# Altium PCB 1x9x1.PcbDoc (part 2 of 2)
Units mil, origin at the board's own origin, x right, y up, seen from the top; angles counter-clockwise.
Board outline 2200 x 5400 mil, 4 copper layers (Top Layer, Mid-Layer 1, Mid-Layer 2, Bottom Layer), stack 43.512 mil thick; 41 components, 51 nets, 356 pads, 603 vias.
Unrouted connection lines stored in the file: 1.
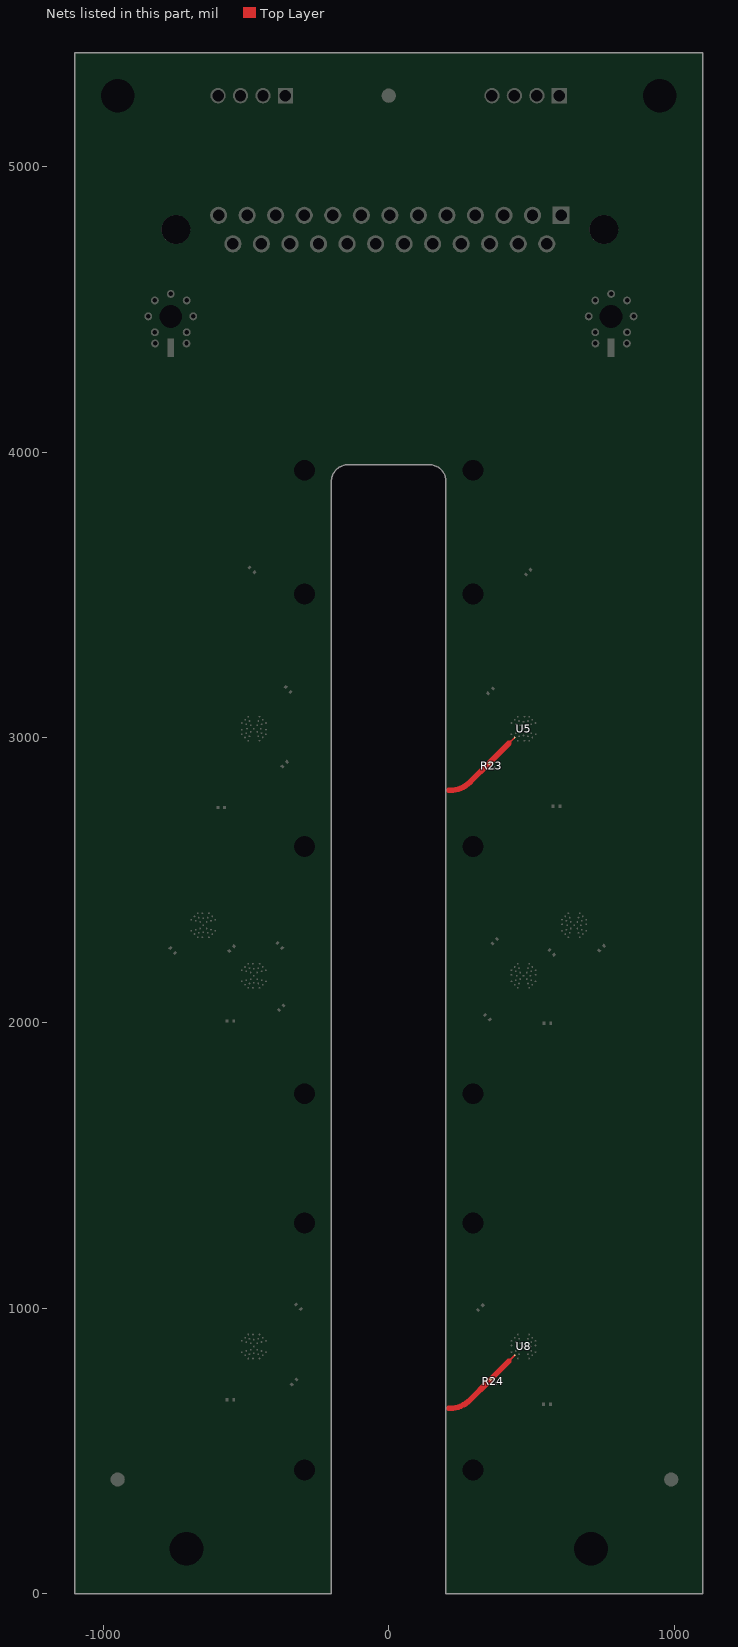
[diagram p4: the nets of this part, all layers, seen from the top]

## Via types
v1: diameter 30, hole 15, Top Layer to Bottom Layer, 563 vias
v2: diameter 25, hole 15, Top Layer to Bottom Layer, 28 vias
v3: diameter 28, hole 28, Top Layer to Bottom Layer, 12 vias

## Nets (pads, with @x,y where several pads share a name; then routed paths per layer and width w, separated by ;. In a path a pad name is that pad's centre, name@x,y a point inside that pad or via, vN(x,y) a via of type N, cw(c..) or ccw(c..) an arc to the next point about the centre after c; other vN are vias at no path point) (continued)
NetR23_2: R23.2 U5.7 | length 303.9
  Top Layer w6: 421.26,2980.32 U5.7@441.5,3000.55
  Top Layer w19.5: 210.89,2814.96 214.48,2814.96 ccw(c214.48,2914.96) 285.19,2844.25 R23.2@352.47,2911.53 ; R23.2@353.65,2910.35 356.38,2913.09 356.38,2915.44 421.26,2980.32
NetR24_2: R24.2 U8.4 | length 303.9
  Top Layer w6: 421.26,814.96 U8.4@441.5,835.2
  Top Layer w19.5: 210.89,649.61 214.48,649.61 ccw(c214.48,749.61) 285.19,678.9 352.47,746.17 ; 353.65,745 356.38,747.73 356.38,750.08 421.26,814.96
pads on no net: f1.1 f2.1 f3.1 J1. J1.13 U1.29 U2.29 U3.29 U4.29 U5.29 U6.29 U7.29 U8.29

## Polygon pours and split planes (outlines as drawn)
GND on Top Layer "NONET_L02_P-001" (solid, pour order 55): -200.79,3900.92 -702.76,3900.92 -702.76,3.6 -419.71,4.92 -200.79,4.92
GND on Top Layer "NONET_L02_P-001" (solid, pour order 40): 201,3897 677,3897 677,-0.22 415,1 201,1
GND on Top Layer "NONET_L02_P-001" (solid, pour order 66): -664.37,3900.59 -664.04,3900.92 -200.79,3900.92 -200.79,3956.69 201,3956.69 201,3897 677.17,3897 677.17,4069.88 -664.37,4069.88 -664.37,3901.57
GND on Top Layer "NONET_L02_P-001" (solid, pour order 56): -681.71,660.92 -865.16,660.92 -865.16,3.92 -681.71,3.92
GND on Top Layer "NONET_L02_P-001" (solid, pour order 54): -662.21,4578.52 -866.21,4578.52 -866.21,656.52 -662.21,656.52
GND on Top Layer "NONET_L02_P-001" (solid, pour order 41): 677,657 881,657 881,0 677,0
GND on Top Layer "NONET_L02_P-001" (solid, pour order 39): 677,4579 881,4579 881,657 677,657
no net on Top Solder "NONET_L-01_P-001" (solid): -200.79,3136 -345,3136 -321,3160 -360,3199 -384,3175 -345,3136 -866.14,3136 -866.14,3532.48 -200.79,3532.48
no net on Top Solder "NONET_L-01_P-001" (solid): 442,698 427,713 360,713 360,675 420,615 466,615 466,673 441,698
no net on Top Solder "NONET_L-01_P-001" (solid): 351.81,846.46 323.83,818.47 318.47,818.47 240.16,740.16 200.79,740.16 200.79,578.74 304.74,578.74 406,680 333,753 332,753 358,779 401,736 375.5,710.5 406,680 406,685.53 439,718.53 439,764 434.27,764
no net on Top Solder "NONET_L-01_P-001" (solid): -205.71,3956.69 200.79,3956.69 200.79,3896.25 676.76,3896.25 677.17,3896.65 677.17,4070.87 -662.4,4070.87 -662.4,3900.59 -205.72,3900.59 -205.63,3900.5
no net on Top Solder "NONET_L02_P-001" (solid): -387.3,2306.59 -338.58,2257.87 -290.35,2306.1 -290.35,2314.96 -335.63,2360.24 -387.3,2308.56
no net on Top Solder "NONET_L02_P-001" (solid): -400.59,2293.31 -374.02,2319.88 -374.02,2371.06 -409.45,2371.06 -411.42,2373.03 -412.4,2372.05 -412.4,2305.12
no net on Top Solder "NONET_L02_P-001" (solid): -416.34,2195.37 -416.34,2221.46 -456.69,2221.46 -456.69,2261.81 -441.93,2276.57 -441.93,2291.34 -439.96,2293.31 -424.21,2293.31 -412.4,2305.12 -400.59,2293.31 -400.59,2292.32 -414.37,2278.54 -374.02,2238.19 -374.02,2237.7
no net on Top Solder "NONET_L02_P-001" (solid): -562.01,2226.38 -518.7,2269.68 -518.7,2269.69 -535.43,2286.42 -498.03,2286.42 -498.03,2285.43 -485.24,2272.64 -485.24,2221.46 -527.56,2221.46 -528.54,2220.47 -534.45,2226.38 -548.23,2226.38
no net on Top Solder "NONET_L02_P-001" (solid): -375.98,2081.69 -370.57,2087.11 -340.55,2057.09 -200.79,2057.09 -200.79,2305.12 -306.59,2305.12 -416.34,2195.37 -416.34,2081.69
no net on Top Solder "NONET_L02_P-001" (solid): -523.15,2024.61 -522.64,2024.09 -522.64,1978.35 -508.86,1978.35 -500,1987.2 -500,1993.11 -508.86,2001.97 -508.86,2019.68 -505.91,2019.68 -497.05,2028.54 -485.24,2028.54 -485.24,2109.25 -528.54,2109.25 -528.54,2220.47 -534.45,2226.38 -562.01,2226.38 -562.01,2024.61
no net on Top Solder "NONET_L02_P-001" (solid): -433.07,1986.22 -418.31,2000.98 -418.31,2025.59 -427.17,2034.45 -451.77,2034.45 -451.77,2109.25 -375.98,2109.25 -375.98,2081.69 -411.42,2046.26 -384.84,2019.68 -336.61,2067.91 -200.79,2067.91 -200.79,1976.38 -430.12,1976.38 -430.12,1983.27
no net on Top Solder "NONET_L02_P-001" (solid): -662.4,2220.47 -680.12,2202.76 -697.83,2202.76 -705.71,2194.88 -705.71,2172.24 -694.88,2161.42 -671.26,2161.42 -637.8,2194.88 -617.13,2194.88 -617.13,2196.85 -605.31,2208.66 -605.31,2226.38 -617.13,2238.19 -631.89,2238.19 -631.89,2286.42 -545.77,2286.42 -580.71,2251.48 -580.71,2250.98 -559.06,2229.33 -562.01,2226.38 -562.01,2024.61 -583.15,2024.61 -582.68,2024.13 -582.68,1970.47 -750,1970.47 -751.97,1972.44 -748.03,1976.38 -748.03,2220.47
no net on Top Solder "NONET_L02_P-001" (solid): -767.41,2282.78 -762.8,2287.4 -762.8,2286.42 -722.44,2246.06 -748.03,2220.47 -662.4,2220.47 -662.4,2286.42 -704.72,2286.42 -705.71,2287.4 -769.33,2287.4 -769.33,2284.7
no net on Top Solder "NONET_L02_P-001" (solid): -866.14,1988.19 -866.14,2287.4 -762.8,2287.4 -788.39,2261.81 -788.39,2260.83 -748.03,2220.47 -748.03,1988.19
no net on Top Solder "NONET_L02_P-001" (solid): -309.06,971.46 -281.5,999.02 -322.83,1040.35 -322.83,1072.83 -200.79,1072.83 -200.79,922.24 -412.15,922.24 -420.28,930.37 -420.28,1074.8 -324.8,1074.8 -322.83,1072.83 -322.83,1038.39 -349.41,1011.81
no net on Top Solder "NONET_L02_P-001" (solid): -485.24,922.24 -485.24,982.28 -500,997.05 -500,1016.73 -505.91,1022.64 -505.91,1046.26 -500.98,1051.18 -473.43,1051.18 -437.01,1014.76 -437.01,1000 -455.71,981.3 -455.71,922.24 -412.15,922.24 -406.5,927.9 -406.5,1072.83 -528.54,1072.83 -528.54,922.24
no net on Top Solder "NONET_L02_P-001" (solid): -528.54,1988.19 -200.79,1988.19 -200.79,1072.83 -528.54,1072.83
no net on Top Solder "NONET_L02_P-001" (solid): -416.34,811.02 -416.34,920.28 -417.32,921.26 -416.34,922.24 -200.79,922.24 -200.79,811.02
no net on Top Solder "NONET_L02_P-001" (solid): -300.28,744.02 -297.24,747.05 -297.24,749.02 -321.85,773.62 -321.85,811.02 -200.79,811.02 -200.79,657.48 -293.31,657.48 -295.28,655.51 -300.28,660.51
no net on Top Solder "NONET_L02_P-001" (solid): -412.4,655.51 -400.59,667.32 -400.59,700.79 -408.46,708.66 -437.01,708.66 -455.71,727.36 -455.71,810.04 -417.32,810.04 -416.34,811.02 -321.85,811.02 -321.85,773.62 -362.2,733.27 -337.6,708.66 -335.63,708.66 -297.24,747.05 -295.28,745.08 -295.28,655.51 -411.42,655.51
no net on Top Solder "NONET_L02_P-001" (solid): -609.25,662.4 -607.28,664.37 -506.89,664.37 -506.89,649.61 -534.45,622.05 -608.27,622.05 -608.27,662.4
no net on Top Solder "NONET_L02_P-001" (solid): -486.22,657.48 -496.06,667.32 -496.06,691.93 -485.24,702.76 -485.24,810.04 -527.56,810.04 -528.54,811.02 -528.54,1988.19 -866.14,1988.19 -866.14,657.48 -582.68,657.48 -582.68,695.87 -527.56,695.87 -524.61,692.91 -524.61,657.48
no net on Top Solder "NONET_L02_P-001" (solid): -867.13,-0.98 -200.79,-0.98 -200.79,657.48 -866.14,657.48 -867.13,656.5 -867.13,0
no net on Top Solder "NONET_L02_P-001" (solid): -612.2,2512.8 -612.2,2480.32 -631.89,2460.63 -631.89,2398.62 -593.5,2398.62 -593.5,2286.42 -498.03,2286.42 -498.03,2301.18 -484.25,2314.96 -461.61,2314.96 -461.61,2320.87 -443.9,2338.58 -421.26,2338.58 -412.4,2329.72 -412.4,2305.12 -200.79,2305.12 -200.79,2512.8
no net on Top Solder "NONET_L02_P-001" (solid): -688.98,2513.78 -697.83,2504.92 -697.83,2476.38 -686.02,2464.57 -662.4,2464.57 -662.4,2399.61 -661.42,2398.62 -705.71,2398.62 -705.71,2287.4 -866.14,2287.4 -866.14,2512.8
no net on Top Solder "NONET_L02_P-001" (solid): -866.14,2846.46 -200.79,2846.46 -200.79,2512.8 -866.14,2512.8 -866.14,2735.24 -556.1,2735.24 -556.1,2773.62 -620.08,2773.62 -620.08,2735.24 -866.14,2735.24
no net on Top Solder "NONET_L02_P-001" (solid): -377.95,2846.46 -377.95,2879.92 -365.16,2879.92 -333.66,2911.42 -333.66,2916.34 -200.79,2916.34 -200.79,2846.46
no net on Top Solder "NONET_L02_P-001" (solid): -200.79,3004.92 -350.39,3004.92 -364.17,3018.7 -416.34,3018.7 -416.34,2975.39 -528.54,2975.39 -528.54,3018.7 -638.78,3018.7 -649.61,3007.87 -670.28,3007.87 -670.28,3010.83 -685.04,3025.59 -866.14,3025.59 -866.14,2846.46 -377.95,2846.46 -377.95,2879.92 -397.64,2899.61 -357.28,2939.96 -333.66,2916.34 -200.79,2916.34
no net on Top Solder "NONET_L02_P-001" (solid): -866.14,3136 -200.79,3136 -200.79,3004.92 -304.13,3004.92 -304.13,3071.85 -324.8,3092.52 -328.74,3092.52 -373.03,3048.23 -416.34,3048.23 -416.34,3087.6 -528.54,3087.6 -528.54,3050.2 -592.52,3050.2 -607.28,3064.96 -607.28,3090.55 -617.13,3100.39 -635.83,3100.39 -650.59,3085.63 -650.59,3059.06 -657.48,3059.06 -685.04,3031.5 -685.04,3025.59 -866.14,3025.59
no net on Top Solder "NONET_L02_P-001" (solid): -865.86,3900.57 -865.84,3900.59 -200.79,3900.59 -200.79,3532.48 -470.47,3532.48 -471.46,3531.5 -471.46,3558.07 -470.47,3558.07 -446.85,3581.69 -486.22,3621.06 -488.19,3621.06 -511.81,3597.44 -471.46,3557.09 -471.46,3532.48 -866.14,3532.48 -866.14,3900.59
no net on Top Solder "NONET_L02_P-001" (solid): -792.32,4325.79 -735.24,4325.79 -735.24,4374.02 -662.4,4374.02 -662.4,3900.59 -866.14,3900.59 -866.14,4374.02 -792.32,4374.02 -866.14,4374.02 -792.32,4374.02
no net on Top Solder "NONET_L02_P-001" (solid): 846.46,2307.09 859.25,2319.88 859.25,2342.52 846.46,2355.32 872.05,2380.91 872.05,2402.56 861.22,2413.39 839.57,2413.39 839.57,2436.02 881.89,2478.35 881.89,2307.09
no net on Top Solder "NONET_L02_P-001" (solid): 610.24,3543.31 401.57,3751.97 200.79,3751.97 200.79,3897.64 201.77,3896.65 677.17,3896.65 677.17,3488.19 610.24,3488.19 677.17,3488.19 610.24,3488.19
no net on Top Solder "NONET_L02_P-001" (solid): 606.3,877.95 881.89,1153.54 881.89,766.73 880.91,765.75 872.05,765.75 868.11,769.68 868.11,792.32 860.24,800.2 838.58,800.2 827.76,789.37 800.2,789.37 711.61,877.95
no net on Top Solder "NONET_L02_P-001" (solid): 423.23,3178.15 423.23,3209.65 430.12,3216.54 507.87,3216.54 500,3224.41 472.44,3224.41 472.44,3488.19 460.63,3488.19 334.65,3614.17 200.79,3614.17 200.79,3310.04 295.28,3310.04 395.67,3209.65 395.67,3178.15
no net on Top Solder "NONET_L02_P-001" (solid): 469.49,2320.87 469.49,2339.57 485.24,2355.32 485.24,2368.11 450.79,2368.11 440.94,2358.27 421.26,2358.27 403.54,2375.98 403.54,2397.64 411.42,2405.51 479.33,2405.51 479.33,2425.2 453.74,2450.79 334.65,2450.79 334.65,2387.8 415.35,2307.09 455.71,2307.09
no net on Top Solder "NONET_L02_P-001" (solid): 200.79,996.06 232.28,996.06 346.46,881.89 293.31,881.89 284.45,890.75 261.81,890.75 250,878.94 250,853.35 259.84,843.5 282.48,843.5 303.15,822.83 316.93,822.83 316.93,823.82 339.57,846.46 346.46,846.46 240.16,740.16 200.79,740.16
no net on Top Solder "NONET_L02_P-001" (solid): 353.04,1985.92 312.99,2025.97 312.99,2026.57 340.55,2054.13 329.23,2065.45 329.23,2120.57 306.59,2120.57 291.34,2135.83 291.34,2151.57 302.17,2162.4 302.17,2199.8 312.01,2199.8 328.74,2216.54 324.8,2220.47 324.8,2238.19 201.77,2238.19 200.79,2237.2 200.79,1981.3 348.43,1981.3
no net on Top Solder "NONET_L02_P-001" (solid): 526.57,2108.27 526.57,1981.3 348.43,1981.3 390.75,2023.62 390.75,2109.25 525.59,2109.25 390.75,2109.25 525.59,2109.25
no net on Top Solder "NONET_L02_P-001" (solid): 200.79,1149.61 291.34,1149.61 472.44,968.5 677.17,1173.23 677.17,1983.27 676.18,1982.28 611.22,1982.28 611.22,1696.85 357.28,1442.91 200.79,1442.91
no net on Top Solder "NONET_L02_P-001" (solid): 200.79,137.8 200.79,0 880.91,0 880.91,724.41 870.08,724.41 858.27,736.22 806.1,736.22 692.91,849.41 646.65,849.41 646.65,363.19 421.26,137.8
no net on Top Solder "NONET_L02_P-001" (solid): 200.79,287.4 354.33,287.4 492.13,425.2 492.13,716.54 437.01,716.54 299.21,578.74 200.79,578.74
no net on Top Solder "NONET_L02_P-001" (solid): 200.79,137.8 421.26,137.8 649.61,366.14
no net on Top Solder "NONET_L02_P-001" (solid): 389.76,3171.26 363.19,3197.83 322.83,3157.48 317.29,3157.48 200.79,3273.98 200.79,3310.04 295.28,3310.04 395.67,3209.65 395.67,3178.15
no net on Top Solder "NONET_L02_P-001" (solid): 349.41,3131.89 395.67,3178.15 423.23,3178.15 435.04,3166.34 450.79,3166.34 456.69,3160.43 456.69,3087.6 419.29,3087.6 418.31,3086.61 373.03,3131.89
no net on Top Solder "NONET_L02_P-001" (solid): 200.79,2968.5 409.45,2968.5 418.31,2977.36 418.31,3086.61 373.03,3131.89 349.41,3131.89 200.79,3280.51 200.79,2977.36
no net on Top Solder "NONET_L02_P-001" (solid): 341.54,2841.54 291.34,2791.34 200.79,2791.34 200.79,2977.36 250.98,2977.36 341.54,2886.81
no net on Top Solder "NONET_L02_P-001" (solid): 356.3,2934.06 331.69,2909.45 331.69,2907.48 370.08,2869.09 342.52,2841.54 341.54,2841.54 341.54,2842.52 245.08,2938.98 351.38,2938.98
no net on Top Solder "NONET_L02_P-001" (solid): 284.45,2464.57 343.5,2405.51 479.33,2405.51 456.69,2428.15 456.69,2677.17 523.62,2744.09 523.62,2832.68 438.98,2832.68 412.4,2859.25 412.4,2874.02 444.88,2906.5 444.88,2976.38 251.97,2976.38 251.97,2938.98 347.44,2938.98 391.73,2894.68 391.73,2891.73 291.34,2791.34 200.79,2791.34 200.79,2464.57
no net on Top Solder "NONET_L02_P-001" (solid): 470.47,1982.28 469.49,1981.3 200.79,1981.3 200.79,1582.68 292.32,1582.68 470.47,1760.83
no net on Top Solder "NONET_L02_P-001" (solid): 525.59,2109.25 416.34,2109.25 416.34,2147.64 356.3,2147.64 302.17,2093.5 302.17,2089.57 392.72,1999.02 415.35,1999.02
no net on Top Solder "NONET_L02_P-001" (solid): 611.22,1982.28 611.22,1696.85 357.28,1442.91 200.79,1442.91 200.79,1582.68 292.32,1582.68 470.47,1760.83 470.47,1982.28
no net on Top Solder "NONET_L02_P-001" (solid): 336.61,2276.57 360.24,2252.95 344.49,2237.2 200.79,2237.2 200.79,2252.95 312.99,2252.95
no net on Top Solder "NONET_L02_P-001" (solid): 360.24,2252.95 336.61,2276.57 377.95,2317.91 401.57,2294.29 428.15,2320.87 284.45,2464.57 200.79,2464.57 200.79,2294.29 200.79,2252.95
no net on Top Solder "NONET_L02_P-001" (solid): 629.92,2216.54 629.92,2193.9 641.73,2182.09 641.73,2124.02 629.92,2112.2 628.94,2113.19 602.36,2113.19 568.9,2146.65 528.54,2146.65 528.54,2130.91 525.59,2127.95 525.59,2017.72 583.66,2017.72 583.66,1979.33 677.17,1979.33 677.17,2216.54
no net on Top Solder "NONET_L02_P-001" (solid): 418.31,2221.46 418.31,2178.15 352.36,2178.15 347.44,2183.07 347.44,2193.9 328.74,2212.6 328.74,2220.47 415.35,2220.47 416.34,2221.46
no net on Top Solder "NONET_L02_P-001" (solid): 525.59,2178.15 590.55,2178.15 590.55,2183.07 601.38,2193.9 629.92,2193.9 629.92,2239.17 603.35,2239.17 580.71,2216.54 576.77,2220.47 525.59,2220.47
no net on Top Solder "NONET_L02_P-001" (solid): 603.35,2239.17 580.71,2216.54 579.72,2216.54 540.35,2255.91 561.02,2276.57 561.02,2281.5 523.32,2319.2 508.25,2304.13 486.22,2304.13 469.49,2320.87 428.15,2320.87 328.74,2221.46 328.74,2220.47 559.06,2220.47 574.8,2204.72 603.35,2204.72
no net on Top Solder "NONET_L02_P-001" (solid): 703.74,2354.33 703.74,2395.67 595.47,2395.67 595.47,2354.33 530.51,2354.33 456.69,2428.15 456.69,2610.24 610.24,2610.24 610.24,2476.38 625.98,2460.63 657.48,2460.63 677.17,2480.32 677.17,2503.94 881.89,2503.94 881.89,2452.76 783.46,2354.33
no net on Top Solder "NONET_L02_P-001" (solid): 677.17,2288.39 594.49,2288.39 594.49,2323.82 518.7,2323.82 627.95,2214.57 677.17,2214.57
no net on Top Solder "NONET_L02_P-001" (solid): 585.63,679.13 586.61,678.15 586.61,649.61 649.61,649.61 646.65,652.56 646.65,849.41 523.62,849.41 523.62,811.02 522.64,810.04 522.64,679.13
no net on Top Solder "NONET_L02_P-001" (solid): 314.96,968.5 287.4,996.06 330.71,1039.37 358.27,1011.81 393.7,1047.24 291.34,1149.61 200.79,1149.61 200.79,996.06 232.28,996.06 287.4,940.94
no net on Top Solder "NONET_L02_P-001" (solid): 417.32,846.46 346.46,846.46 382.59,793.59 437.01,716.54 492.13,716.54 492.13,425.2 354.33,287.4 200.79,287.4 200.79,137.8 421.26,137.8 649.61,366.14 649.61,649.61 526.57,649.61 526.57,811.02 417.32,811.02
no net on Top Solder "NONET_L02_P-001" (solid): 480.32,3547.24 523.62,3590.55 500,3614.17 519.69,3633.86 610.24,3543.31 610.24,3488.19 539.37,3488.19
no net on Top Solder "NONET_L02_P-001" (solid): 460.63,3488.19 334.65,3614.17 200.79,3614.17 200.79,3751.97 401.57,3751.97 519.69,3633.86 456.69,3570.87 539.37,3488.19
no net on Top Solder "NONET_L02_P-001" (solid): 677.17,3086.61 488.19,3086.61 488.19,3165.35 507.87,3185.04 507.87,3216.54 500,3224.41 472.44,3224.41 472.44,3488.19 677.17,3488.19
no net on Top Solder "NONET_L02_P-001" (solid): 523.62,2858.27 523.62,2870.08 488.19,2905.51 488.19,2976.38 527.56,2976.38 527.56,3086.61 677.17,3086.61 677.17,2858.27
no net on Top Solder "NONET_L02_P-001" (solid): 559.06,2858.27 618.11,2858.27 618.11,2779.53 559.06,2779.53
no net on Top Solder "NONET_L02_P-001" (solid): 559.06,2744.09 559.06,2858.27 523.62,2858.27 523.62,2744.09
no net on Top Solder "NONET_L02_P-001" (solid): 618.11,2744.09 618.11,2858.27 677.17,2858.27 677.17,2744.09
no net on Top Solder "NONET_L02_P-001" (solid): 456.69,2610.24 456.69,2677.17 523.62,2744.09 677.17,2744.09 677.17,2610.24
no net on Top Solder "NONET_L02_P-001" (solid): 610.24,2610.24 677.17,2610.24 677.17,2480.32 657.48,2460.63 625.98,2460.63 610.24,2476.38
no net on Top Solder "NONET_L02_P-001" (solid): 629.92,901.57 606.3,877.95 531.5,877.95 531.5,925.2 413.39,925.2 413.39,881.89 346.46,881.89 287.4,940.94 393.7,1047.24 472.44,968.5 511.81,1007.87
no net on Top Solder "NONET_L02_P-001" (solid): 712.6,2255.91 748.03,2291.34 759.84,2291.34 779.53,2271.65 740.16,2232.28 736.22,2232.28 751.97,2216.54 881.89,2216.54 881.89,2307.09 811.02,2307.09 795.28,2322.83 703.74,2322.83 703.74,2288.39 680.12,2288.39
no net on Top Solder "NONET_L02_P-001" (solid): 677.17,2216.54 677.17,2288.39 680.12,2288.39 751.97,2216.54
no net on Top Solder "NONET_L02_P-001" (solid): 881.89,1188.98 881.89,1153.54 622.05,893.7 606.3,909.45 606.3,913.39
no net on Top Solder "NONET_L02_P-001" (solid): 881.89,1188.98 606.3,913.39 511.81,1007.87 677.17,1173.23 677.17,1188.98
no net on Top Solder "NONET_L02_P-001" (solid): 677.17,2216.54 881.89,2216.54 881.89,1188.98 677.17,1188.98
no net on Top Solder "NONET_L02_P-001" (solid): 677.17,4374.02 750.98,4374.02 750.98,4323.82 751.97,4322.83 807.09,4322.83 807.09,4373.03 808.07,4374.02 881.89,4374.02 881.89,4307.09 677.17,4307.09
no net on Top Solder "NONET_L02_P-001" (solid): 677.17,4307.09 881.89,4307.09 881.89,2503.94 677.17,2503.94
GND on Bottom Layer "NONET_L-01_P-001" (solid, pour order 67): -200.79,3897.64 -201,3897.85 -201,3957 201,3957 200.79,3956.79 200.79,3892.06 676.94,3892.06 676.98,3892.02 676.98,4069.95 -660.95,4069.95 -661,4070 -661.08,4069.92 -661.08,3897.54 -200.88,3897.54
GND on Bottom Layer "NONET_L02_P-001" (solid, pour order 46): 676.8,4578.61 880.8,4578.61 880.8,656.61 676.8,656.61
GND on Bottom Layer "NONET_L02_P-001" (solid, pour order 60): -200.79,3897.64 -681.1,3897.64 -681.1,-5.28 -394.4,-3.94 -200.79,-3.94
GND on Bottom Layer "NONET_L02_P-001" (solid, pour order 62): -661.05,656.61 -865.05,656.61 -865.05,-0.39 -661.05,-0.39
GND on Bottom Layer "NONET_L02_P-001" (solid, pour order 61): -661.05,4578.61 -865.05,4578.61 -865.05,656.61 -661.05,656.61
GND on Bottom Layer "NONET_L02_P-001" (solid, pour order 47): 676.8,656.61 880.8,656.61 880.8,-0.39 676.8,-0.39
GND on Bottom Layer "NONET_L02_P-001" (solid, pour order 42): 200.79,3892.06 696.85,3892.06 696.85,-5.28 410.15,-3.94 200.79,-3.94
GND on Mid-Layer 1 "NONET_L-01_P-001" (solid, pour order 69): -201.89,3897.76 -202.11,3897.98 -202.11,3957.13 199.89,3957.13 199.68,3956.91 199.68,3892.19 675.83,3892.19 683,3885.02 683,4070.07 -662.05,4070.07 -662.11,4070.13 -662.18,4070.05 -662.18,3897.67 -201.99,3897.67
GND on Mid-Layer 1 "NONET_L02_P-001" (solid, pour order 63): -200.79,3897.64 -698.82,3897.64 -698.82,-5.36 -394.4,-3.94 -200.79,-3.94
GND on Mid-Layer 1 "NONET_L02_P-001" (solid, pour order 65): -622.05,656.74 -866.14,656.74 -866.14,-0.26 -622.05,-0.26
GND on Mid-Layer 1 "NONET_L02_P-001" (solid, pour order 64): -662.14,4578.74 -866.14,4578.74 -866.14,656.74 -662.14,656.74
GND on Mid-Layer 1 "NONET_L02_P-001" (solid, pour order 49): 637.8,656.74 881.89,656.74 881.89,-0.26 637.8,-0.26
GND on Mid-Layer 1 "NONET_L02_P-001" (solid, pour order 48): 677.89,4578.74 881.89,4578.74 881.89,656.74 677.89,656.74
GND on Mid-Layer 1 "NONET_L02_P-001" (solid, pour order 44): 200.79,3892.06 714.57,3892.06 714.57,-5.36 410.15,-3.94 200.79,-3.94
GND on Mid-Layer 2 "NONET_L-01_P-001" (solid, pour order 70): 200.79,4070 -206,4070 -206,3957 201,3957
GND on Mid-Layer 2 "NONET_L02_P-001" (solid, pour order 57): -205.71,4070 -706.41,4070 -706.41,3.58 -419.71,4.92 -205.71,4.92
GND on Mid-Layer 2 "NONET_L02_P-001" (solid, pour order 59): -687.45,665.6 -865.16,665.6 -865.16,5.91 -687.45,5.91
GND on Mid-Layer 2 "NONET_L02_P-001" (solid, pour order 58): -661.28,4578.79 -865.28,4578.79 -865.28,656.79 -661.28,656.79
GND on Mid-Layer 2 "NONET_L02_P-001" (solid, pour order 53): 677.89,656.74 881.89,656.74 881.89,-0.26 677.89,-0.26
GND on Mid-Layer 2 "NONET_L02_P-001" (solid, pour order 52): 677.89,4578.74 881.89,4578.74 881.89,656.74 677.89,656.74
GND on Mid-Layer 2 "NONET_L02_P-001" (solid, pour order 45): 200.79,4070 696.85,4070 696.85,-5.28 410.15,-3.94 200.79,-3.94
no net on Top Courtyard "NONET_L02_P-001" (solid): -508.86,3596.46 -486.22,3619.09 -485.24,3619.09 -445.87,3579.72 -468.5,3557.09 -469.49,3557.09
no net on Bottom Solder "NONET_L-01_P-001" (solid): -662.4,4070.87 -662.4,3956.69 677.17,3956.69 677.17,4070.87
no net on Bottom Solder "NONET_L-01_P-001" (solid): -866.14,2148.62 -690.94,2148.62 -690.94,2163.39 -697.83,2163.39 -704.72,2170.28 -704.72,2201.77 -700.79,2205.71 -669.29,2205.71 -639.76,2235.24 -616.14,2235.24 -602.36,2221.46 -602.36,2200.79 -598.43,2200.79 -591.54,2207.68 -591.54,2357.28 -866.14,2357.28
no net on Bottom Solder "NONET_L-01_P-001" (solid): -866.14,2148.62 -203.74,2148.62 -200.79,2145.67 -200.79,2357.28 -430.12,2357.28 -430.12,2335.63 -428.15,2335.63 -414.37,2321.85 -414.37,2303.15 -424.21,2293.31 -451.77,2293.31 -458.66,2286.42 -458.66,2279.53 -459.65,2279.53 -466.54,2272.64 -488.19,2272.64 -499.02,2283.46 -499.02,2304.13 -489.17,2313.98 -459.65,2313.98 -455.71,2317.91 -455.71,2328.74 -448.82,2335.63 -430.12,2335.63 -430.12,2357.28 -591.54,2357.28 -591.54,2224.41 -619.09,2196.85 -652.56,2196.85 -665.35,2184.06 -665.35,2170.28 -671.26,2164.37
no net on Bottom Solder "NONET_L-01_P-001" (solid): -866.14,2148.62 -866.14,1958.66 -412.4,1958.66 -412.4,1987.2 -495.08,1987.2 -509.84,2001.97 -509.84,2016.73 -498.03,2028.54 -477.36,2028.54 -477.36,2027.56 -467.52,2017.72 -457.68,2017.72 -445.87,2029.53 -432.09,2029.53 -415.35,2012.8 -415.35,2001.97 -430.12,1987.2 -412.4,1987.2 -412.4,1958.66 -412.2,1958.46 -200.59,1958.46 -200.59,2145.47 -203.74,2148.62
no net on Bottom Solder "NONET_L-01_P-001" (solid): -866.14,966.54 -864.17,964.57 -455.71,964.57 -455.71,986.22 -468.5,986.22 -479.33,997.05 -479.33,1008.86 -493.11,1008.86 -504.92,1020.67 -504.92,1040.35 -493.11,1052.17 -476.38,1052.17 -461.61,1037.4 -461.61,1029.53 -451.77,1029.53 -439.96,1017.72 -439.96,995.08 -448.82,986.22 -455.71,986.22 -455.71,964.57 -454.25,963.11 -200.59,963.11 -200.59,1958.46 -200.79,1958.66 -866.14,1958.66
no net on Bottom Solder "NONET_L-01_P-001" (solid): -866.14,966.54 -866.14,655.51 -486.22,655.51 -487.2,656.5 -487.2,662.4 -494.09,669.29 -494.09,689.96 -482.28,701.77 -465.55,701.77 -455.71,691.93 -443.9,691.93 -432.09,703.74 -413.39,703.74 -402.56,692.91 -402.56,671.26 -411.42,662.4 -459.65,662.4 -463.58,658.46 -486.22,658.46 -487.2,659.45 -487.2,655.51 -200.79,655.51 -200.59,655.71 -200.59,963.11
no net on Bottom Solder "NONET_L-01_P-001" (solid): -866.14,0 -200.79,0 -200.79,655.51 -866.14,655.51
no net on Bottom Solder "NONET_L-01_P-001" (solid): -866.14,2560.04 -654.53,2560.04 -654.53,2512.8 -688.98,2512.8 -697.83,2503.94 -696.85,2502.95 -696.85,2482.28 -687.01,2472.44 -623.03,2472.44 -623.03,2474.41 -612.2,2485.24 -612.2,2502.95 -622.05,2512.8 -654.53,2512.8 -654.53,2560.04 -200.79,2560.04 -200.79,2357.28 -866.14,2357.28
no net on Bottom Solder "NONET_L-01_P-001" (solid): -866.14,2944.88 -507.87,2944.88 -425.2,3027.56 -425.2,3102.36 -625,3102.36 -625,3094.49 -619.09,3094.49 -607.28,3082.68 -607.28,3064.96 -634.84,3037.4 -634.84,3022.64 -650.59,3006.89 -666.34,3006.89 -682.09,3022.64 -682.09,3046.26 -674.21,3054.13 -650.59,3054.13 -645.67,3059.06 -649.61,3062.99 -649.61,3087.6 -641.73,3095.47 -625,3095.47 -625,3102.36 -625.98,3101.38 -866.14,3101.38
no net on Bottom Solder "NONET_L-01_P-001" (solid): -200.79,3101.38 -200.79,2560.04 -312.01,2560.04 -312.01,3049.21 -309.06,3052.17 -309.06,3071.85 -311.02,3071.85 -321.85,3082.68 -324.8,3079.72 -347.44,3079.72 -352.36,3074.8 -352.36,3052.17 -346.46,3046.26 -346.46,3041.34 -355.31,3032.48 -355.31,3012.8 -342.52,3000 -312.01,3000 -312.01,2560.04 -866.14,2560.04 -866.14,2944.88 -507.87,2944.88 -425.2,3027.56 -425.2,3102.36 -201.77,3102.36
no net on Bottom Solder "NONET_L-01_P-001" (solid): -200.79,3956.69 -662.4,3956.69 -662.4,4070.87 -662.4,4578.74 -866.14,4578.74 -865.16,4577.76 -866.14,3101.38 -200.79,3101.38
no net on Bottom Solder "NONET_L-01_P-001" (solid): 677.17,3956.69 677.17,4070.87 677.17,4578.74 881.89,4578.74 881.89,3956.69
no net on Bottom Solder "NONET_L-01_P-001" (solid): 200.79,3074.8 200.79,3956.69 881.89,3956.69 881.89,3074.8 507.87,3074.8 507.87,3204.72 496.06,3216.54 472.44,3216.54 464.57,3208.66 433.07,3208.66 421.26,3196.85 421.26,3177.17 433.07,3165.35 507.87,3165.35 507.87,3074.8
no net on Bottom Solder "NONET_L-01_P-001" (solid): 200.79,2818.9 200.79,3074.8 881.89,3074.8 881.89,2818.9 511.81,2818.9 511.81,2874.02 500,2885.83 433.07,2885.83 417.32,2870.08 417.32,2850.39 429.13,2838.58 511.81,2838.58 511.81,2818.9
no net on Bottom Solder "NONET_L-01_P-001" (solid): 200.79,2405.51 200.79,2818.9 881.89,2818.9 881.89,2409.45 866.14,2409.45 858.27,2417.32 838.58,2417.32 826.77,2405.51 826.77,2366.14 807.09,2346.46 523.62,2346.46 515.75,2354.33 476.38,2354.33 476.38,2350.39 472.44,2346.46 460.63,2358.27 460.63,2389.76 444.88,2405.51 409.45,2405.51 393.7,2389.76 393.7,2405.51
no net on Bottom Solder "NONET_L-01_P-001" (solid): 200.79,2283.46 881.89,2283.46 881.89,2409.45 870.08,2409.45 870.08,2377.95 854.33,2362.2 854.33,2307.09 807.09,2307.09 807.09,2346.46 523.62,2346.46 523.62,2318.9 511.81,2307.09 488.19,2307.09 472.44,2322.83 472.44,2346.46 460.63,2358.27 409.45,2358.27 393.7,2374.02 393.7,2405.51 200.79,2405.51
no net on Bottom Solder "NONET_L-01_P-001" (solid): 200.79,2165.35 200.79,2283.46 881.89,2283.46 881.89,2161.42 645.67,2161.42 645.67,2185.04 629.92,2200.79 598.43,2200.79 578.74,2181.1 578.74,2161.42 350.39,2161.42 350.39,2196.85 338.58,2208.66 307.09,2208.66 299.21,2200.79 299.21,2165.35
no net on Bottom Solder "NONET_L-01_P-001" (solid): 200.79,2165.35 299.21,2165.35 299.21,2125.98 311.02,2114.17 338.58,2114.17 350.39,2125.98 350.39,2161.42 586.61,2161.42 590.55,2157.48 590.55,2122.05 606.3,2106.3 633.86,2106.3 645.67,2118.11 645.67,2161.42 881.89,2161.42 881.89,2043.31 200.79,2043.31
no net on Bottom Solder "NONET_L-01_P-001" (solid): 881.89,716.54 881.89,724.41 866.14,724.41 854.33,736.22 854.33,751.97 846.46,751.97 826.77,771.65 826.77,795.28 838.58,807.09 881.89,807.09 881.89,2043.31 200.79,2043.31 200.79,893.7 299.21,893.7 338.58,854.33 338.58,838.58 318.9,818.9 314.96,822.83 283.46,822.83 248.03,858.27 248.03,893.7 200.79,893.7 200.79,716.54
no net on Bottom Solder "NONET_L-01_P-001" (solid): 881.89,0 881.89,716.54 200.79,716.54 200.79,0

## Other copper
Top Layer:
  region net NetR22_2: 218.63,1092.36 200.81,1092.36 200.81,1072.77 218.63,1072.77
  region net NetR24_2: 218.63,659.51 200.81,659.51 200.81,639.92 218.63,639.92
  region net NetR19_2: 218.02,226.3 200.79,226.3 200.79,206.77 218.02,206.77
  region net NetR18_2: 218.5,1525.59 200.68,1525.59 200.68,1505.88 218.5,1505.88
  region net NetR15_1: 218.63,1958.73 200.81,1958.73 200.81,1939.13 218.63,1939.13
  region net NetR17_2: 218.63,2391.58 200.81,2391.58 200.81,2371.98 218.63,2371.98
  region net NetR23_2: 218.63,2824.87 200.81,2824.87 200.81,2805.27 218.63,2805.27
  region net NetR14_1: 218.63,3257.72 200.81,3257.72 200.81,3238.12 218.63,3238.12
  region net NetR13_2: 218.5,3690.94 200.68,3690.94 200.68,3671.23 218.5,3671.23
  rectangle net NetR1_2: -218.02,206.77 -200.79,226.3
  rectangle net NetR5_2: -218.5,1505.88 -200.68,1525.59
  rectangle net NetR3_2: -218.63,1072.77 -200.81,1092.36
  rectangle net NetR2_1: -218.63,639.92 -200.81,659.51
  rectangle net NetR7_1: -218.63,2371.98 -200.81,2391.58
  rectangle net NetR6_2: -218.63,1939.13 -200.81,1958.73
  rectangle net NetR10_2: -218.63,2805.27 -200.81,2824.87
  rectangle net NetR12_1: -218.63,3238.12 -200.81,3257.72
  rectangle net NetR11_2: -218.5,3671.23 -200.68,3690.94
  pour cut-out: -829.28,4476.38 ccw(c-763.78,4476.38) -763.78,4410.88 ccw(c-763.78,4476.38) -698.28,4476.38 ccw(c-763.78,4476.38) -763.78,4541.88 ccw(c-763.78,4476.38)
  pour cut-out: 714.03,4476.38 ccw(c779.53,4476.38) 779.53,4410.88 ccw(c779.53,4476.38) 845.03,4476.38 ccw(c779.53,4476.38) 779.53,4541.88 ccw(c779.53,4476.38)
  pour cut-out: -791.78,4326.38 -771.78,4306.38 -755.78,4306.38 -735.78,4326.38
  pour cut-out: -791.78,4326.38 -791.78,4476.38 -735.78,4476.38 -735.78,4326.38
  pour cut-out: 751.53,4326.38 771.53,4306.38 787.53,4306.38 807.53,4326.38
  pour cut-out: 751.53,4326.38 751.53,4476.38 807.53,4476.38 807.53,4326.38
Mid-Layer 1:
  pour cut-out: -764.28,4541.88 ccw(c-764.28,4476.38) -829.78,4476.38 ccw(c-764.28,4476.38) -764.28,4410.88 ccw(c-764.28,4476.38) -698.78,4476.38 ccw(c-764.28,4476.38)
  pour cut-out: 779.03,4541.88 ccw(c779.03,4476.38) 713.53,4476.38 ccw(c779.03,4476.38) 779.03,4410.88 ccw(c779.03,4476.38) 844.53,4476.38 ccw(c779.03,4476.38)
  pour cut-out: -785.78,4330.38 -741.78,4330.38 -763.78,4308.38
  pour cut-out: -785.78,4330.38 -785.78,4476.38 -741.78,4476.38 -741.78,4330.38
  pour cut-out: 757.53,4330.38 801.53,4330.38 779.53,4308.38
  pour cut-out: 757.53,4330.38 757.53,4476.38 801.53,4476.38 801.53,4330.38
Mid-Layer 2:
  pour cut-out: -764.28,4541.88 ccw(c-764.28,4476.38) -829.78,4476.38 ccw(c-764.28,4476.38) -764.28,4410.88 ccw(c-764.28,4476.38) -698.78,4476.38 ccw(c-764.28,4476.38)
  pour cut-out: 779.03,4541.88 ccw(c779.03,4476.38) 713.53,4476.38 ccw(c779.03,4476.38) 779.03,4410.88 ccw(c779.03,4476.38) 844.53,4476.38 ccw(c779.03,4476.38)
  pour cut-out: 779.03,4541.88 ccw(c779.03,4476.38) 713.53,4476.38 ccw(c779.03,4476.38) 779.03,4410.88 ccw(c779.03,4476.38) 844.53,4476.38 ccw(c779.03,4476.38)
  pour cut-out: -785.78,4330.38 -741.78,4330.38 -763.78,4308.38
  pour cut-out: -785.78,4330.38 -785.78,4476.38 -741.78,4476.38 -741.78,4330.38
  pour cut-out: 757.53,4330.38 801.53,4330.38 779.53,4308.38
  pour cut-out: 757.53,4330.38 757.53,4476.38 801.53,4476.38 801.53,4330.38
Bottom Layer:
  pour cut-out: -764.28,4541.88 ccw(c-764.28,4476.38) -829.78,4476.38 ccw(c-764.28,4476.38) -764.28,4410.88 ccw(c-764.28,4476.38) -698.78,4476.38 ccw(c-764.28,4476.38)
  pour cut-out: 779.03,4541.88 ccw(c779.03,4476.38) 713.53,4476.38 ccw(c779.03,4476.38) 779.03,4410.88 ccw(c779.03,4476.38) 844.53,4476.38 ccw(c779.03,4476.38)

## Silkscreen, mask and mechanical layers (free items; w line width, h text height)
Top Overlay:
  text "1" at 625,5318 h39.37 r90
  text "17" at -569.11,5309 h39.37 r90
  text "16" at -494.11,5309 h39.37 r90
  text "15" at -414.11,5309 h39.37 r90
  text "14" at -334.11,5309 h39.37 r90
  text "4" at 389.89,5309 h39.37 r90
  text "3" at 464.89,5309 h39.37 r90
  text "2" at 544.89,5309 h39.37 r90
  text "RED" at -413,5068 h39.37 r90
  text "RED" at 547,5068 h39.37 r90
  text "BLUE" at -570,5028 h39.37 r90
  text "BLUE" at 390,5028 h39.37 r90
  text "WHITE" at -334,4996 h39.37 r90
  text "WHITE" at 626,4996 h39.37 r90
  text "GREEN" at -492,4989 h39.37 r90
  text "GREEN" at 468,4989 h39.37 r90
  text "2024" at -90,4950 h49.21
  text "github.com/lafefspietz/QNA / 1x9x1.*" at -440,4405 h49.21
  text "QNA" at -314.96,4074.8 h196.85
  text "9" at -990,3610 h118.11
  text "9" at 960,3610 h118.11
  text "8" at -990,3185 h118.11
  text "8" at 960,3185 h118.11
  text "7" at -990,2760 h118.11
  text "7" at 960,2760 h118.11
  text "6" at -990,2335 h118.11
  text "6" at 960,2335 h118.11
  text "5" at -990,1885 h118.11
  text "5" at 960,1885 h118.11
  text "4" at -990,1460 h118.11
  text "4" at 960,1460 h118.11
  text "3" at -990,1035 h118.11
  text "3" at 960,1035 h118.11
  text "2" at -990,585 h118.11
  text "2" at 960,585 h118.11
  text "1" at -965,160 h118.11
  text "1" at 985,160 h118.11
Top Solder:
  pour cut-out: -523.15,2024.61 -523.15,1989.61 -583.15,1989.61 -583.15,2024.61
Mechanical 1:
  lines w10: -1100,0 -200.79,0 -200.79,3543.31 -200.79,3897.64 cw(c-141.73,3897.64) -141.73,3956.69 141.73,3956.69 cw(c141.73,3897.64) 200.79,3897.64 200.79,3665.35 200.79,0 1100,0 1100,5400 -1100,5400 -1100,0
Mechanical 16:
  lines w10: 335,752 359,776 399,736 375,712 335,752